# Altium PCB AXIS_POT.PcbDoc
Units mil, origin at the board's own origin, x right, y up, seen from the top; angles counter-clockwise.
Board outline 1300 x 1300 mil, 2 copper layers (Top Layer, Bottom Layer); 2 components, 3 nets, 12 pads, 0 vias.
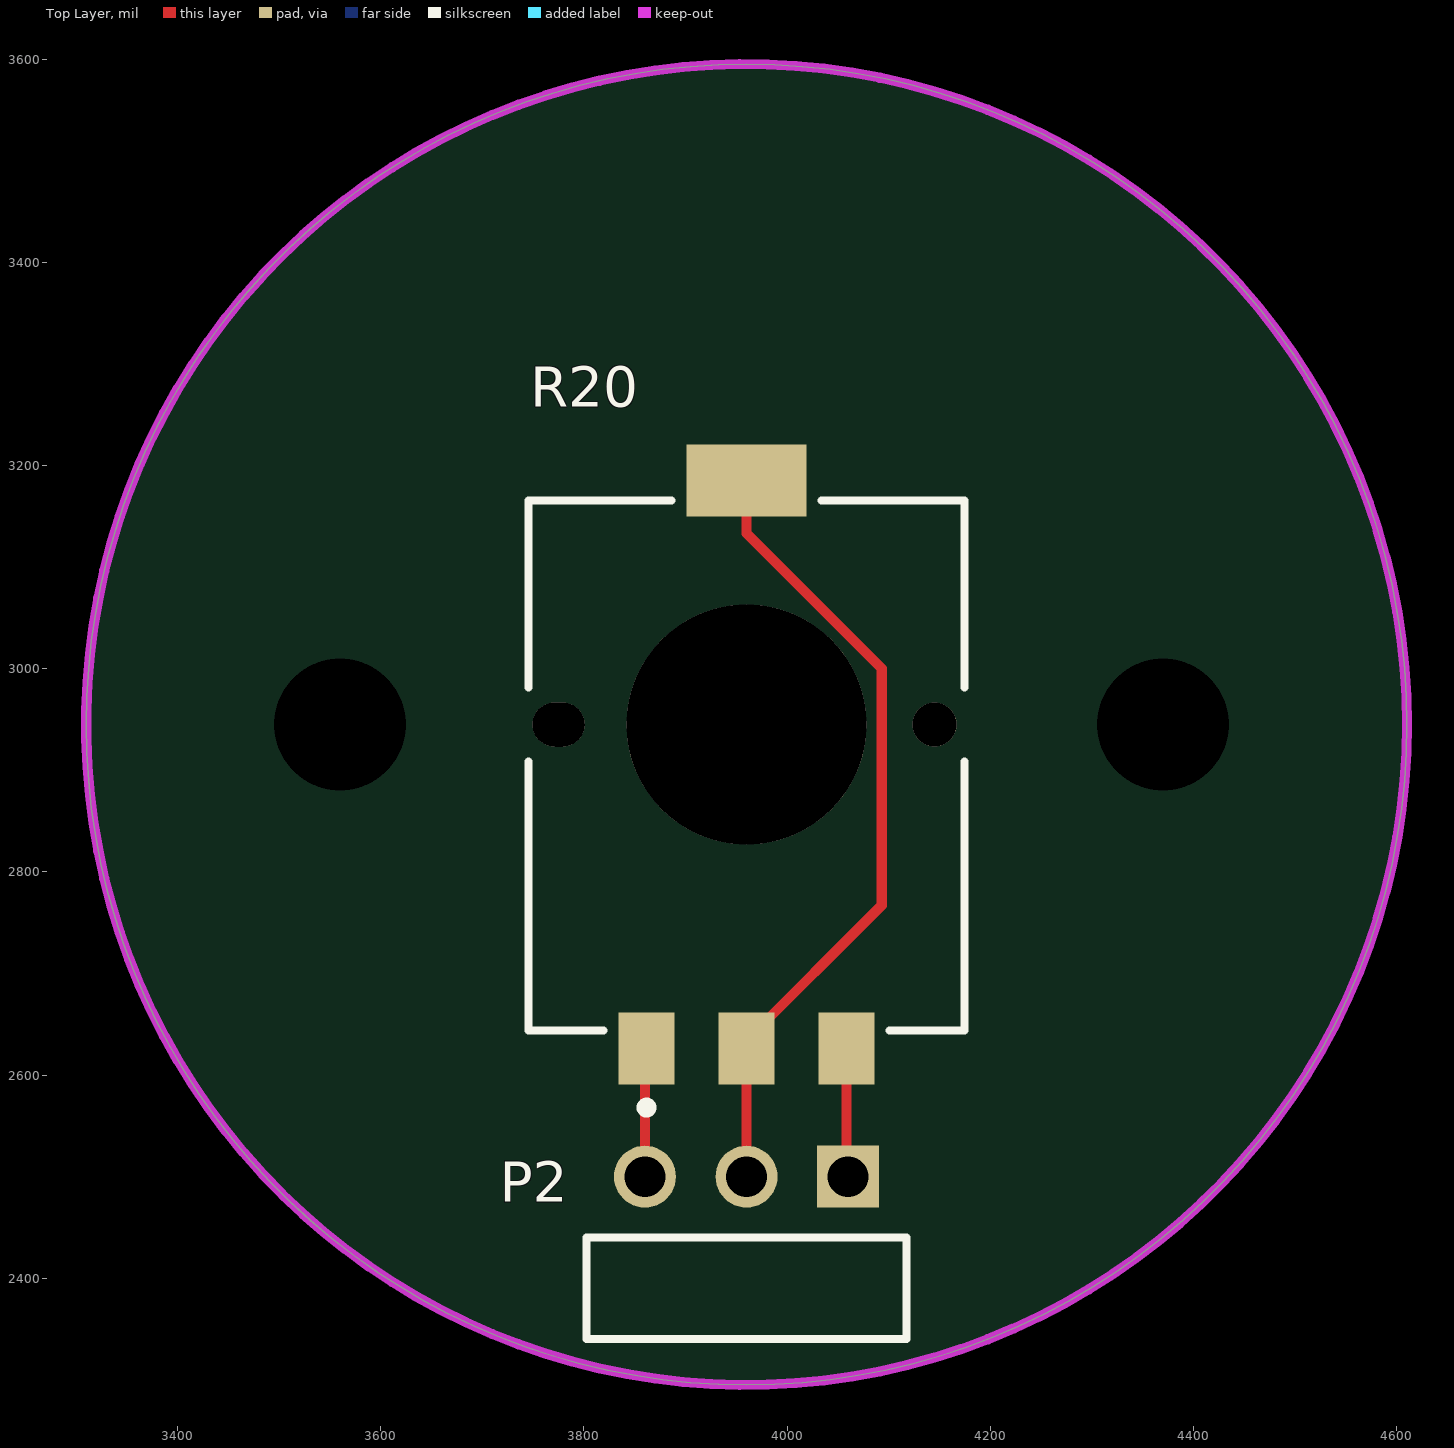
[diagram p0: Top Layer view]
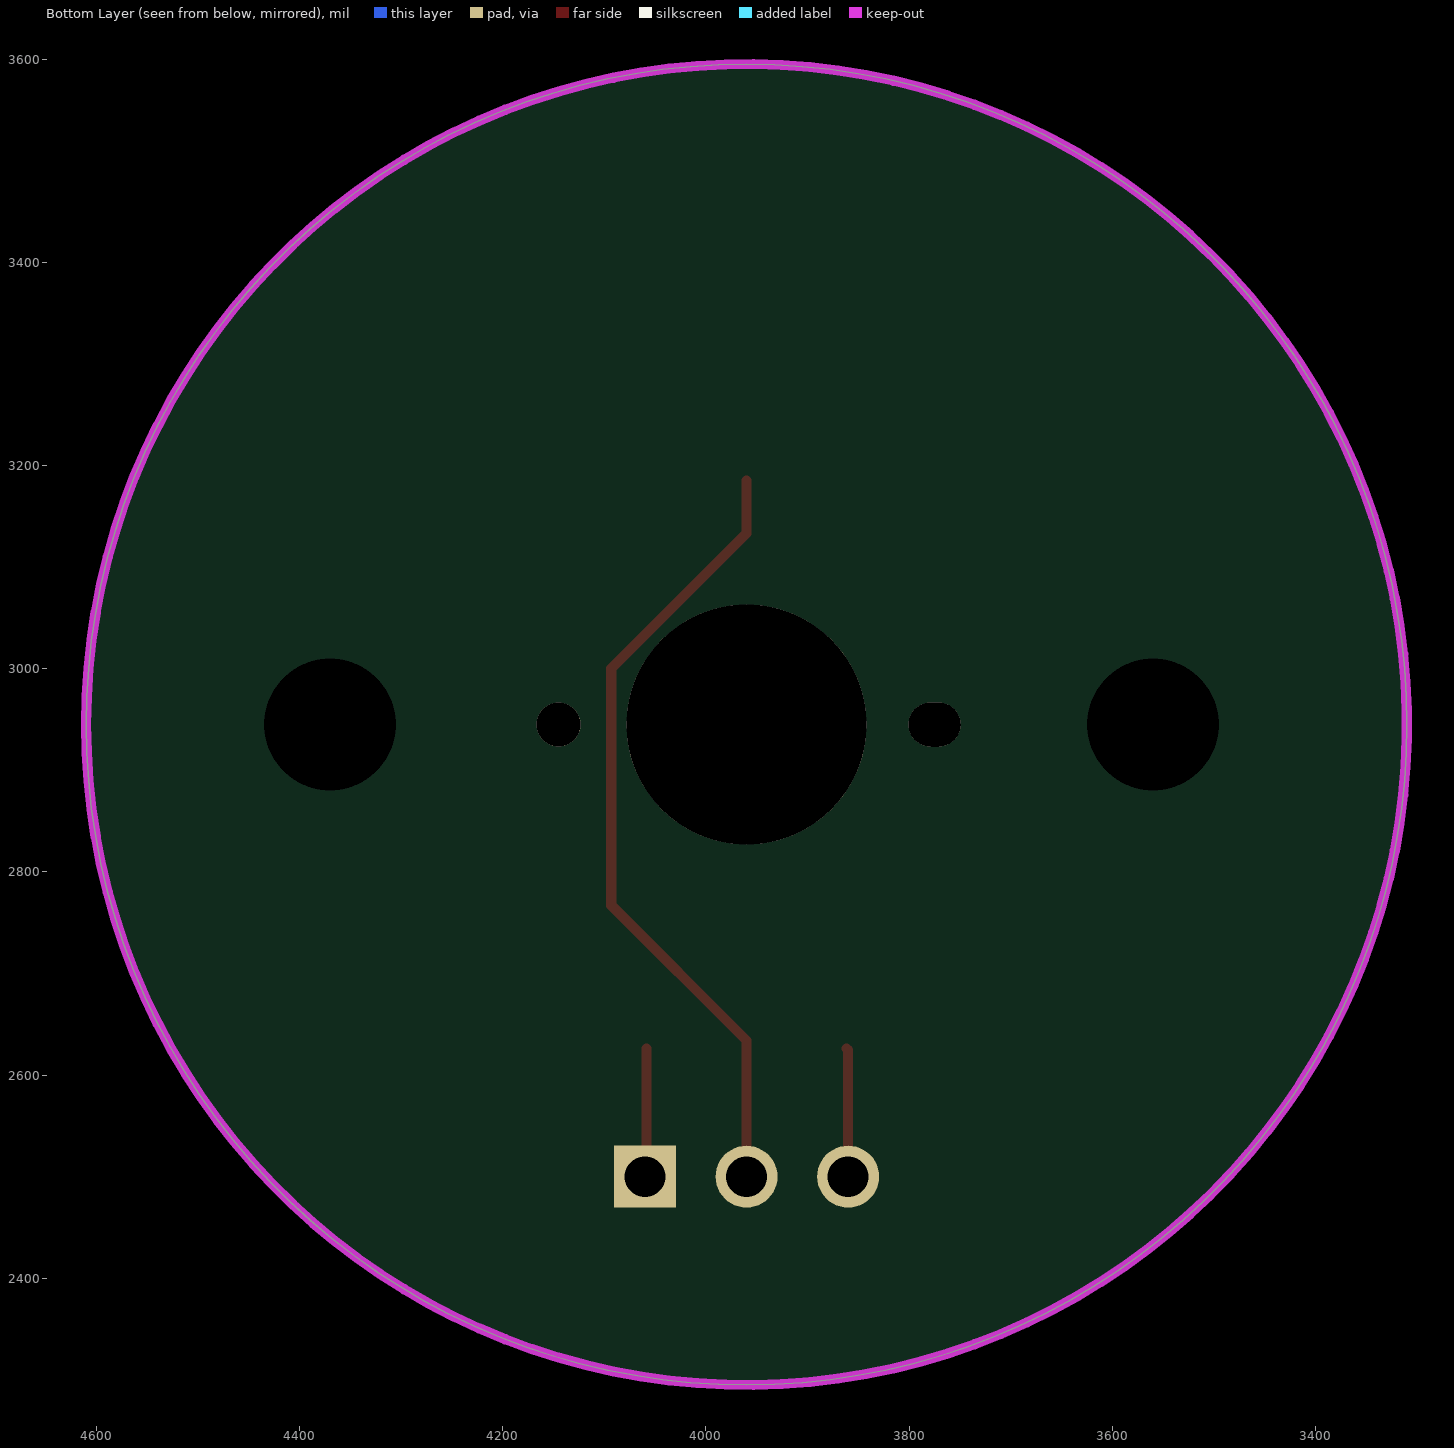
[diagram p1: Bottom Layer view, seen from below]

## Layer stack, top to bottom
Top Solder: solder mask 0.4, Solder Resist, Dk 3.5
Top Layer: signal copper 1.4
Dielectric 1: dielectric 12.6, FR-4, Dk 4.8
Bottom Layer: signal copper 1.4
Bottom Solder: solder mask 0.4, Solder Resist, Dk 3.5

## Board outline
3310,2945 ccw(c3960,2945) 3960,2295 ccw(c3960,2945) 4610,2945 ccw(c3960,2945) 3960,3595 ccw(c3960,2945)

## Design rules (kind name [scope] priority, off if disabled: settings)
Clearance Clearance_1 [OnMid vs OnMid] p1: gap=10 ignorepadtopadclearanceinfootprint=FALSE sourcerule=36 cellrowname=All cellrowtype=0 cellcolname=All cellcoltype=0 innerlayers=TRUE
Clearance Clearance_2 [(ExistsOnLayer('Top Layer') Or ExistsOnLayer('Bottom Layer')) vs (ExistsOnLayer('Top Layer') Or ExistsOnLayer('Bottom Layer'))] p2: gap=10 ignorepadtopadclearanceinfootprint=FALSE sourcerule=36 cellrowname=All cellrowtype=0 cellcolname=All cellcoltype=0 outerlayers=TRUE
Clearance [All] p3: gap=10 ignorepadtopadclearanceinfootprint=FALSE ismatrix=TRUE
HoleSize [All] p1: absolutevalues=TRUE maxlimit=250 minlimit=1 maxpercent=80.000 minpercent=20.000
PolygonConnect [All] p1: connectstyle=Relief reliefconductorwidth=10 reliefentries=4 polygonreliefangle="90 Angle" airgapwidth=10
RoutingVias [All] p1: holewidth=28 width=50 viastyle="Through Hole" minholewidth=28 minwidth=50 maxholewidth=28 maxwidth=50
SolderMaskExpansion [All] p1: expansion=4 istentingtop=FALSE
Width [All] p1: maxlimit=10 minlimit=10 preferedwidth=10
29 further rules are at their usual default settings.

## Components (designator, comment, footprint, x,y, rotation, side; value= is the part's Value field where it differs from the comment)
P2 "TSW-103-08-F-S-RA" SMTC-TSW-103-08-X-S-RA 4060,2500 r180 top
R20 "EVW-AE4001B14" FP-EVW-AE4001B14-MFG 3960,2904.65 r0 top

## Footprints (in the part's own frame and the unit in brackets; to place one, negate y for a bottom-side part, rotate by r counter-clockwise, add the part's x,y. Pads: shape width x height; smd on the part's side, far side on the other; paste and mask are expansions set on the pad)
FP-EVW-AE4001B14-MFG [mm]
  rect 1.4x1.8 smd paste+0 mask+0: 1(-2.5,-7.075) 2(0,-7.075) 3(2.5,-7.075)
  rect 3x1.8 smd paste+0 mask+0: 2'(0,7.125)
  rrect100% 1.3x1.1 hole 1.1 slot 1.3 at 0 deg unplated paste-2539.97 mask+0: ""(-4.7,1.025)
  round 6 hole 6 unplated paste-2539.97 mask+0: ""(0,1.025)
  round 1.1 hole 1.1 unplated paste-2539.97 mask+0: ""(4.7,1.025)
  silkscreen extent -5.45,-8.67 5.45,6.63, body extent -5.55,-8.08 5.55,8.13, height 0.25
SMTC-TSW-103-08-X-S-RA [mm] ".025 SQ Post Terminal Strip Assembly, 1x3 Pins, Right Angle, 2.54mm Pitch, Male"
  rect 1.55x1.55 hole 1.02: 1(0,0)
  round 1.55 hole 1.02: 2(2.54,0) 3(5.08,0)
  silkscreen extent -1.46,1.52 6.54,4.06, body extent -1.27,-0.32 6.35,9.9, height 3.05

## Part data
P2: library part CMP-1024-00344-1, "0.025\" SQ Post Header, Through-hole, Right Angle, -55 to 125 degC, 2.54 mm Pitch, 3-Pin, Male, RoHS", Manufacturer=Samtec, Temperature Range="-55 to 125 degC", ComponentLink1Description="Manufacturer URL", ComponentLink1URL=http://www.samtec.com, ComponentLink2Description=Datasheet, ComponentLink2URL=http://www.samtec.com/documents/webfiles/pdf/TSW_TH.PDF, ComponentLink3Description="Package Specification", ComponentLink3URL=http://www.samtec.com/documents/webfiles/cpdf/TSW-XXX-XX-XXX-X-XX-XXX-MKT.pdf, DatasheetVersion=F-214, Mounting Technology=Through-hole, Orientation="Right Angle", PackageDescription=".025[0.64] SQ. Post Terminal Strip Assembly", PackageReference=TSW-103-08-X-S-RA, PackageVersion="DM, 8/1988", PartNumber=TSW-103-08-F-S-RA, Pitch="2.54 mm", RoHS=True
R20: library part CMP-00287-39595731-1, "EVW-AE4001B14 Res POT 10K Ohm 30% 1/20W 4mm (10.6 X 15.4 X 3.4mm) Thru-Hole Embossed T/R", Max Operating Temperature=85°C, Max Supply Voltage=5V, Min Operating Temperature=-40°C, Power Rating=50mW, Resistance=10kΩ, Tolerance=30%, Composition=Potentiometer, Contact Plating=Silver, Depth=15.4mm, Lead Free="Lead Free", Length=10.6mm, Linearity=2%, Military Standard=Not, Min Supply Voltage (DC)=5V, Mount="Surface Mount, Through Hole", NexarPartId=39595731, Number of Pins=4, Packaging="Cut Tape", Radiation Hardening=No, REACH SVHC=Unknown, RoHS=Compliant, Schedule B="8536509065, 8536509065", Sensing Method=Resistive, Termination=SMD/SMT, Type=Potentiometer

## Free pads (board coordinates)
  round 0 hole 130 unplated: 5(4370,2945) 6(3560,2945)

## Nets (pads, with @x,y where several pads share a name; then routed paths per layer and width w, separated by ;. In a path a pad name is that pad's centre, name@x,y a point inside that pad or via, vN(x,y) a via of type N, cw(c..) or ccw(c..) an arc to the next point about the centre after c; other vN are vias at no path point)
3V3: P2.3 R20.1 | length 126.8
  Top Layer w10: P2.3 3860,2624.53 R20.1
AXIS_POT: P2.2 R20.2 R20.2' | length 795.4
  Top Layer w10: P2.2 R20.2 3960,2633.98 4093.11,2767.09 4093.11,3000.14 3960,3133.25 R20.2'
GND: P2.1 R20.3 | length 126.8
  Top Layer w10: R20.3 4058.43,2501.57 P2.1
pads on no net: R20.

## Keep-outs
Keep-Out Layer:
  circle w10: c3960,2945 r650.02

## Silkscreen, mask and mechanical layers (free items; w line width, h text height)
Mechanical 2:
  circle w10: c3960,2945 r650